# Altium PCB PCB_STM32.PcbDoc (part 2 of 2)
Units mm, origin at the board's own origin, x right, y up, seen from the top; angles counter-clockwise.
Board outline 65.5 x 38.75 mm, 2 copper layers (Top Layer, Bottom Layer), stack 1.569 mm thick; 43 components, 32 nets, 212 pads, 42 vias.
Unrouted connection lines stored in the file: 9.
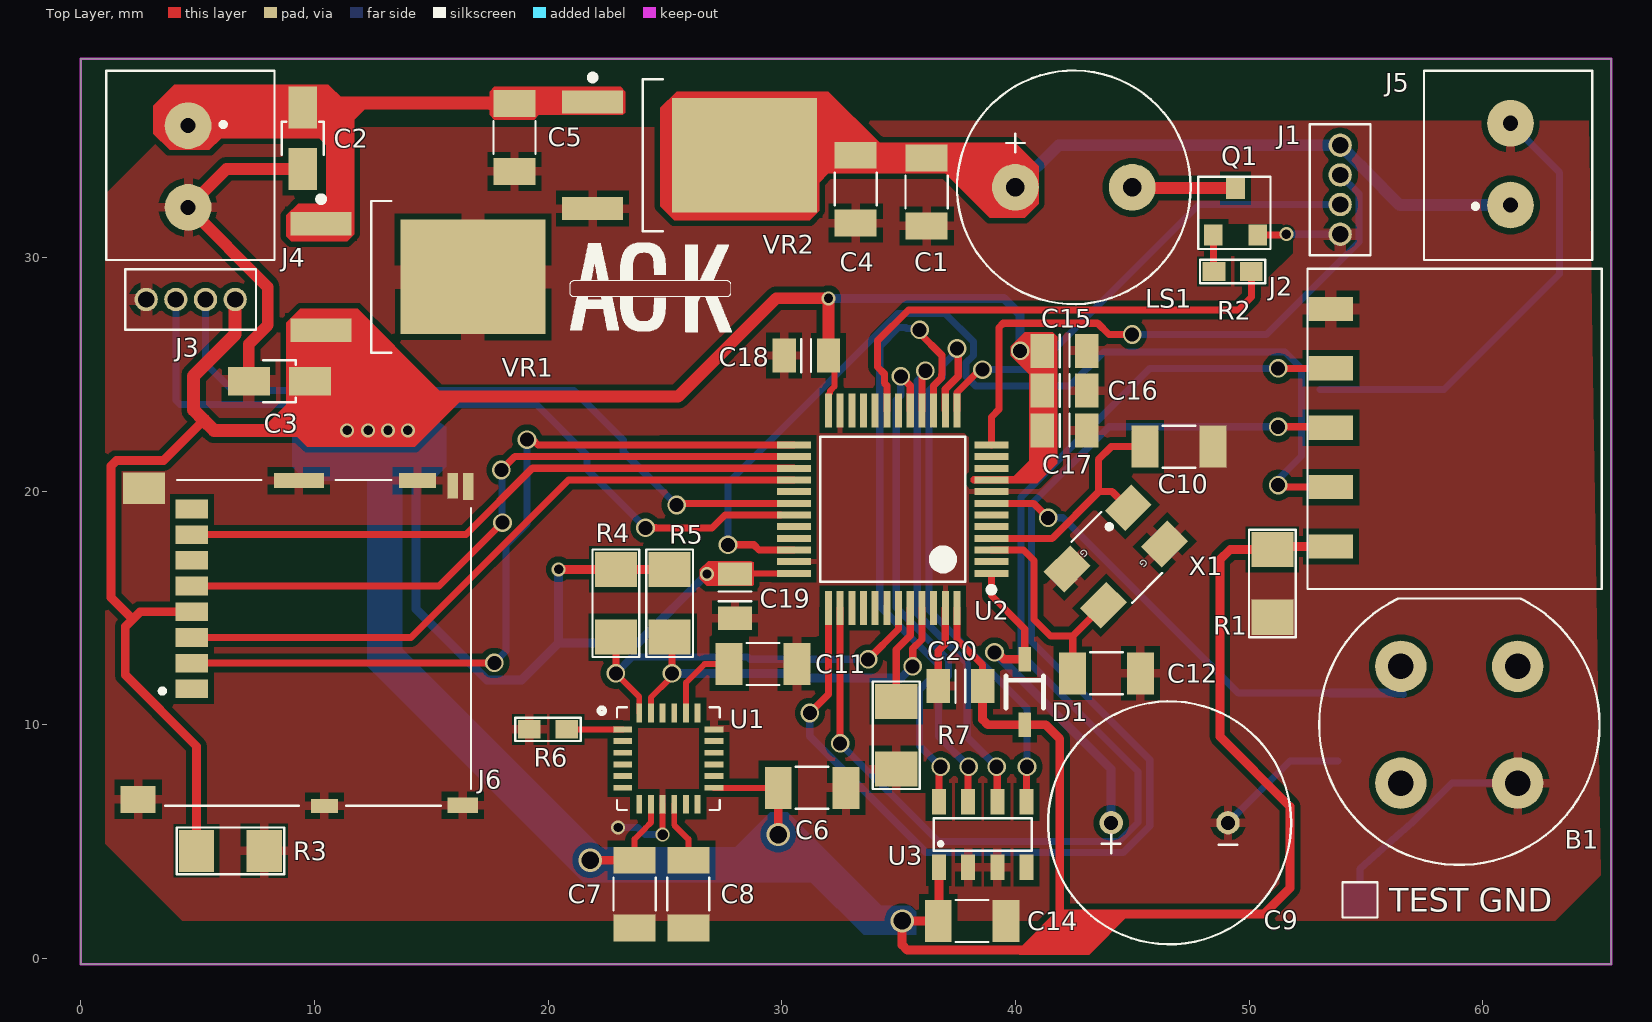
[diagram p0: Top Layer view]

## Via types
v1: diameter 0.8, hole 0.6, Top Layer to Bottom Layer, 29 vias
v2: diameter 0.6, hole 0.4, Top Layer to Bottom Layer, 9 vias
v3: diameter 1, hole 0.75, Top Layer to Bottom Layer, 3 vias
v4: diameter 0.6, hole 0.45, Top Layer to Bottom Layer, 1 vias

## Nets (pads, with @x,y where several pads share a name; then routed paths per layer and width w, separated by ;. In a path a pad name is that pad's centre, name@x,y a point inside that pad or via, vN(x,y) a via of type N, cw(c..) or ccw(c..) an arc to the next point about the centre after c; other vN are vias at no path point) (continued)
GND: (continued)
  Bottom Layer w0.305: v2(23,5.6) 23.84,5.6 24.14,5.3 v4(24.9,5.3) ; C9.2 51.75,8.45 C13.2 ; v2(51.595,30.995) 51.598,30.993 53.897,30.993 J1.4 ; 53.05,24.35 58.35,24.35 63.289,29.289 63.289,33.642 J5.2 J5.2@61.269,36.282 ; 54.75,2.5 54.75,3.825 56.512,5.387 ccw(c42.059,21.692) 57.466,6.285 58.681,7.5 B1.3
GYRO_SCL: R5.1 U1.23 U2.45 | length 16.9
  Top Layer w0.254: U1.23@24.4,10.5 24.4,11.161 v1@25.205,11.967
  Top Layer w0.305: v1@25.205,11.967 25.205,12.105 v1(25.3,12.2) R5.1@25.3,13.65 ; v1(35.605,12.5) 35.605,13.255 36,13.65 U2.45
  Top Layer w0.381: R5.1 R5.1@25.3,13.65
  Bottom Layer w0.381: v1(25.3,12.2) 30.257,12.2 30.457,12 35.105,12 v1(35.605,12.5)
GYRO_SDA: R4.1 U1.24 U2.43 | length 17.5
  Top Layer w0.254: v1(22.9,12.2) 23.9,11.2 U1.24@23.9,10.5
  Top Layer w0.305: v1(22.9,12.2) R4.1 ; v1(33.7,12.8) 35,14.1 U2.43
  Bottom Layer w0.305: v1(22.9,12.2) 23.605,12.905 28.533,12.905 28.638,12.8 v1(33.7,12.8)
NetC8_1: C8.1 U1.10 | length 2.6
  Top Layer w0.254: U1.10@25.4,6.6 25.4,5.7 26,5.1 C8.1
NetC9_1: C9.1 D1.1 U2.1 | length 14.7
  Top Layer w0.305: U2.1 38.975,15.525 40.4,14.1 D1.1@40.4,13.2
  Top Layer w0.381: v1(39.102,13.098) 39.216,13.098 39.513,12.8 D1.1
  Bottom Layer w0.381: v1(39.102,13.098) 44.1,8.1 C9.1
NetC10_1: C10.1 U2.4 X1.1 | length 10.6
  Top Layer w0.305: U2.4 41.575,17.975 43.55,19.95 ; X1.1 44.143,19.974 43.574,19.974 43.55,19.95 ; C10.1 44.1,21.9 43.55,21.35 43.55,19.95
NetC11_1: C11.1 U1.20 | length 3.5
  Top Layer w0.254: U1.20@25.9,10.5 25.9,11.8 26.7,12.6 C11.1
NetC12_1: C12.1 U2.3 X1.3 | length 9.9
  Top Layer w0.305: U2.3 40.346,17.475 40.8,17.021 40.8,14.5 41.5,13.8 42.456,13.8 ; C12.1@42.456,12.206 42.456,13.8 ; X1.3 42.456,13.8
NetJ1_2: J1.2 U2.12 | length 25.7
  Top Layer w0.305: U2.12 38.975,23.175 39.3,23.5 39.3,27.005 39.479,27.184 43.522,27.184 44.006,26.7 v1(45,26.7)
  Bottom Layer w0.305: v1(45,26.7) 50.748,26.7 54.705,30.657 54.705,32.725 J1.2
NetJ1_3: J1.3 U2.13 | length 20.5
  Top Layer w0.305: U2.13 37.5,24.213 38.485,25.198 v1(38.595,25.198)
  Bottom Layer w0.305: v1(38.595,25.198) 38.597,25.2 40.8,25.2 47.865,32.265 J1.3
NetJ2_2: J2.2 U2.34 | length 44.7
  Top Layer w0.305: v1(27.7,17.7) 28.8,17.7 29.025,17.475 U2.34 ; v1@51,20.25 51.08,20.17 J2.2
  Bottom Layer w0.305: v1(27.7,17.7) 27.7,20.343 34.96,27.603 36.994,27.603 38.206,26.39 38.206,25.806 37.89,25.49 37.89,24.907 38.303,24.494 42.317,24.494 43.778,25.955 51.542,25.955 52.25,25.247 52.25,21.5 v1@51,20.25
  other v1: 51.25,20.25
NetJ2_3: J2.3 U2.37 | length 53
  Top Layer w0.305: v1(31.2,10.5) 32,11.3 U2.37 ; v1@51,22.75 53.46,22.75 J2.3
  Bottom Layer w0.305: v1(31.2,10.5) 31.2,9.503 36.165,4.538 44.623,4.538 45.75,5.665 45.75,8.5 40.695,13.555 40.695,19.445 44,22.75 v1@51,22.75
  other v1: 51.25,22.75
NetJ2_4: J2.4 U2.38 | length 52.2
  Top Layer w0.305: v1(32.5,9.2) 32.5,14.123 U2.38 ; v1(51.25,25.25) J2.4
  Bottom Layer w0.305: v1(32.5,9.2) 36.705,4.995 44.433,4.995 45.25,5.812 45.25,8 40.238,13.012 40.238,19.738 45.75,25.25 v1(51.25,25.25)
NetJ3_2: J3.2 U2.30 | length 30.8
  Top Layer w0.305: v1(25.5,19.4) 25.575,19.475 U2.30
  Bottom Layer w0.305: J3.2 5.335,25.465 6.5,24.3 21.1,24.3 23.214,22.186 23.214,21.686 v1(25.5,19.4)
NetJ3_3: J3.3 U2.31 | length 33.1
  Top Layer w0.305: v1(24.171,18.429) 24.612,18.429 24.626,18.414 27.014,18.414 27.575,18.975 U2.31@29.952,18.975
  Bottom Layer w0.305: J3.3 4.07,23.879 4.249,23.7 19.5,23.7 21.664,21.536 21.664,20.936 v1(24.171,18.429)
NetJ6_2: J6.2 U2.25 | length 34.6
  Top Layer w0.305: J6.2 4.757,12.642 17.693,12.642 v1(17.7,12.65) ; v1(19.1,22.2) 19.342,22.2 19.567,21.975 24.756,21.975 24.757,21.976 26.643,21.976 26.644,21.975 U2.25
  Bottom Layer w0.305: v1(17.7,12.65) 18.2,13.15 18.2,17.7 19.1,18.6 v1(19.1,22.2)
NetJ6_3: J6.3 U2.28 | length 28.6
  Top Layer w0.305: J6.3 14.135,13.735 20.875,20.475 U2.28
NetJ6_5: J6.5 U2.26 | length 29.5
  Top Layer w0.305: J6.5 15.335,15.935 v1(18.05,18.65) ; v1(18,20.9) 18.575,21.475 U2.26
  Bottom Layer w0.305: v1(18,20.9) 18.025,20.875 18.025,18.675 v1(18.05,18.65)
NetJ6_7: J6.7 U2.27 | length 27
  Top Layer w0.305: J6.7 16.485,18.135 19.325,20.975 U2.27
NetLS1_2: LS1.2 Q1.2 | length 4.4
  Top Layer w0.508: LS1.2@45.024,32.974 Q1.2@49.406,32.974
NetQ1_1: Q1.1 R2.2 | length 1.6
  Top Layer w0.305: R2.2@48.4,29.4 48.472,29.472 Q1.1
NetR2_1: R2.1 U2.19 | length 21
  Top Layer w0.305: U2.19 34.5,24.509 34.39,24.618 34.39,25.019 34.1,25.31 34.1,26.431 35.419,27.75 49.55,27.75 50.1,28.3 R2.1
NetR6_2: R6.2 U1.1 | length 2.4
  Top Layer w0.254: R6.2 U1.1@23.2,9.8
NRST: B1.1 C13.1 U2.7 | length 21
  Top Layer w0.305: U2.7 40.782,19.475 v1(41.4,18.857)
  Bottom Layer w0.305: v1(41.4,18.857) 42.043,18.857 49.55,11.35 C13.1@53.475,11.35 ; 56.55,11.35 56.6,11.3
  Bottom Layer w0.381: C13.1@53.475,11.35 53.65,11.35 C13.1 56.55,11.35
PRES_SDI: U2.17 U3.7 | length 21.6
  Top Layer w0.305: v1(35.095,24.91) 35.5,24.505 U2.17 ; U3.7 37.975,8.175 v1(38,8.2)
  Bottom Layer w0.305: v1(35.095,24.91) 35.095,24.096 34.9,23.901 34.9,15.01 37.143,12.767 37.143,12.095 36.705,11.657 36.705,9.495 v1(38,8.2)
PRESS_NSS: U2.14 U3.5 | length 24.5
  Top Layer w0.305: U2.14 37,24.36 37.553,24.913 37.553,26.047 v1(37.502,26.098) ; U3.5 40.475,8.175 v1(40.5,8.2)
  Bottom Layer w0.305: v1(37.502,26.098) 37.502,25.995 36.879,25.373 36.879,24.886 36.3,24.307 36.3,14.903 40.5,10.703 v1(40.5,8.2)
PRESS_SCLK: U2.15 U3.8 | length 27.3
  Top Layer w0.305: v1(35.902,26.898) 35.902,26.764 36.851,25.815 36.851,24.997 36.843,24.989 36.843,24.849 36.5,24.507 U2.15 ; U3.8 36.725,8.125 v1(36.8,8.2)
  Bottom Layer w0.305: v1(35.902,26.898) 35.841,26.959 35.349,26.959 35.308,27 35.003,27 34.195,26.192 34.195,15.068 36.686,12.578 36.686,12.284 35.9,11.498 35.9,9.1 v1(36.8,8.2)
PRESS_SDO: U2.16 U3.6 | length 21.8
  Top Layer w0.305: U2.16 36,24.869 36.146,25.015 v1(36.146,25.149) ; v1(39.2,8.2) 39.225,8.175 U3.6
  Bottom Layer w0.305: v1(36.146,25.149) 36.146,25.06 35.8,24.714 35.8,14.757 37.94,12.616 37.94,9.46 v1(39.2,8.2)
pads on no net: B1.2 B1.4 J6.1 J6.6 J6.8 U1.2 U1.3 U1.4 U1.5 U1.6 U1.7 U1.11 U1.12 U1.14 U1.15 U1.16 U1.17 U1.19 U1.21 U1.22 U2.2 U2.5 U2.6 U2.10 U2.11 U2.18 U2.20 U2.21 U2.22 U2.29 U2.32 U2.33 U2.39 U2.40 U2.41 U2.42 U2.46 U3.4

## Polygon pours and split planes (outlines as drawn)
GND on Top Layer "GND_L01_P000" (solid, remove dead copper, pour order 0): 64.55,35.85 4.2,35.85 1.05,32.7 1.05,4.9 4.35,1.6 63.1,1.6 65.05,3.55

## Keep-outs
Keep-Out Layer:
  the board outline again, w0.1

## Other copper
Top Layer:
  region net 3V3DC: 40.16,0.16 43.16,0.16 44.9,1.9 41.9,1.9
  pour cut-out: 38.561,22.379 38.557,22.383 37.906,22.383 37.906,24.034 38.437,24.564 38.757,24.564 38.759,24.565 38.854,24.47 38.886,24.47 38.886,23.672 38.85,23.636 38.85,22.4
  pour cut-out: 24.463,35.563 11.914,35.563 11.914,35.748 12.016,35.85 24.541,35.85 24.541,35.609 24.587,35.563
  pour cut-out: 49.126,31.447 51.412,31.447 51.897,30.962 51.897,30.188 50.854,29.145 50.805,29.193 50.736,29.193 50.736,30.054 48.886,30.054 48.886,30.254 49.126,30.254
  region net 3V3DC: 16.025,23.625 16.4,24 15.65,24 15.538,24.112
  region net 3V3DC: 15.05,24.6 16.025,23.625 15.05,22.65
  region net 3V3DC: 38.1,20.4 38.173,20.327 40.927,20.327 41.8,21.2 41.8,26.6 41.6,26.8 40.4,26.8 39.802,26.202 39.802,25.798 40.6,25 40.6,21.3 39.925,20.625 38.175,20.625 38.1,20.55
  region net 3V3DC: 28.7,17 26.85,17 26.5,16.65 26.5,16.25 26.8,15.95 28.75,15.95 28.8,16 28.8,16.95
  region net 7V4DC: 11.7,35.816 11.7,35.9 12.3,36.5 12.2,36.6 11.2,36.6
  region net 7V4DC: 8.8,30.9 9,30.7 11.4,30.7 11.7,31 11.7,35.3 11.7,36.333 12.1,36.6 11.2,36.6 11.2,36.8 10.6,37.4 4,37.4 3.1,36.5 3.1,35.3 3.8,34.6 5.5,34.6 6,35.1 10.2,35.1 10.5,34.8 10.5,32.4 10.4,32.3 9.3,32.3 8.8,31.8
  region net 5VDC: 25.5,37.1 32,37.1 34.2,34.9 40,34.9 41,33.9 41,32.3 40.4,31.7 38.9,31.7 37,33.6 32,33.6 31.6,33.2 31.6,32 31.2,31.6 25.4,31.6 24.8,32.2 24.8,36.4
  region net 3V3DC: 7.9,22.8 9,23.9 9.3,23.9 9.3,22.7 9.1,22.5
  region net 3V3DC: 9.4,27.8 8.8,27.2 8.8,22.8 9.7,21.9 14.3,21.9 15.05,22.65 15.05,24.6 11.85,27.8
  region net 7V4DC: 19.6,36.1 19.4,35.9 17.7,35.9 17.5,36.1 17.5,37.1 17.7,37.3 23.1,37.3 23.3,37.1 23.3,36.2 23.2,36.1
Bottom Layer:
  rectangle net GND: 54,1.75 55.5,3.25
  region net 3V3DC: 12.25,12.5 21.5,3.25 31.25,3.25 33.5,1 35.75,1 35.75,2 35.5,2.25 34.25,2.25 30.25,6.25 29.5,6.25 28,4.75 22.25,4.75 13.75,13.25 13.75,20.45 15.05,20.45 15.65,21.05 15.65,22.75 15.1,23.1 9.7,23.1 9.05,22.45 9.05,21.05 9.65,20.45 12.25,20.45

## Silkscreen, mask and mechanical layers (free items; w line width, h text height)
Top Overlay:
  drawing of 1196 lines, arcs and shapes, not listed
  text "TEST GND" at 56,2 h1
Bottom Overlay:
  lines w0.1: 54,1.75 55.5,1.75 55.5,3.25 54,3.25 54,1.75
  text "TEST GND" at 63.75,2 h1
Top Solder:
  rectangle: 54,1.75 55.5,3.25
Bottom Solder:
  rectangle: 54,1.75 55.5,3.25
Drill Guide:
  the board outline again, w0.1

## Text inside footprints (layer, text, board x,y; h text height)
X1: Top Overlay "G" at 42.956,17.554 h0.3 r225; Top Overlay "G" at 45.502,17.129 h0.3 r225